# EAGLE board atx-psu-breakout_v1.3 (EAGLE 5.07)
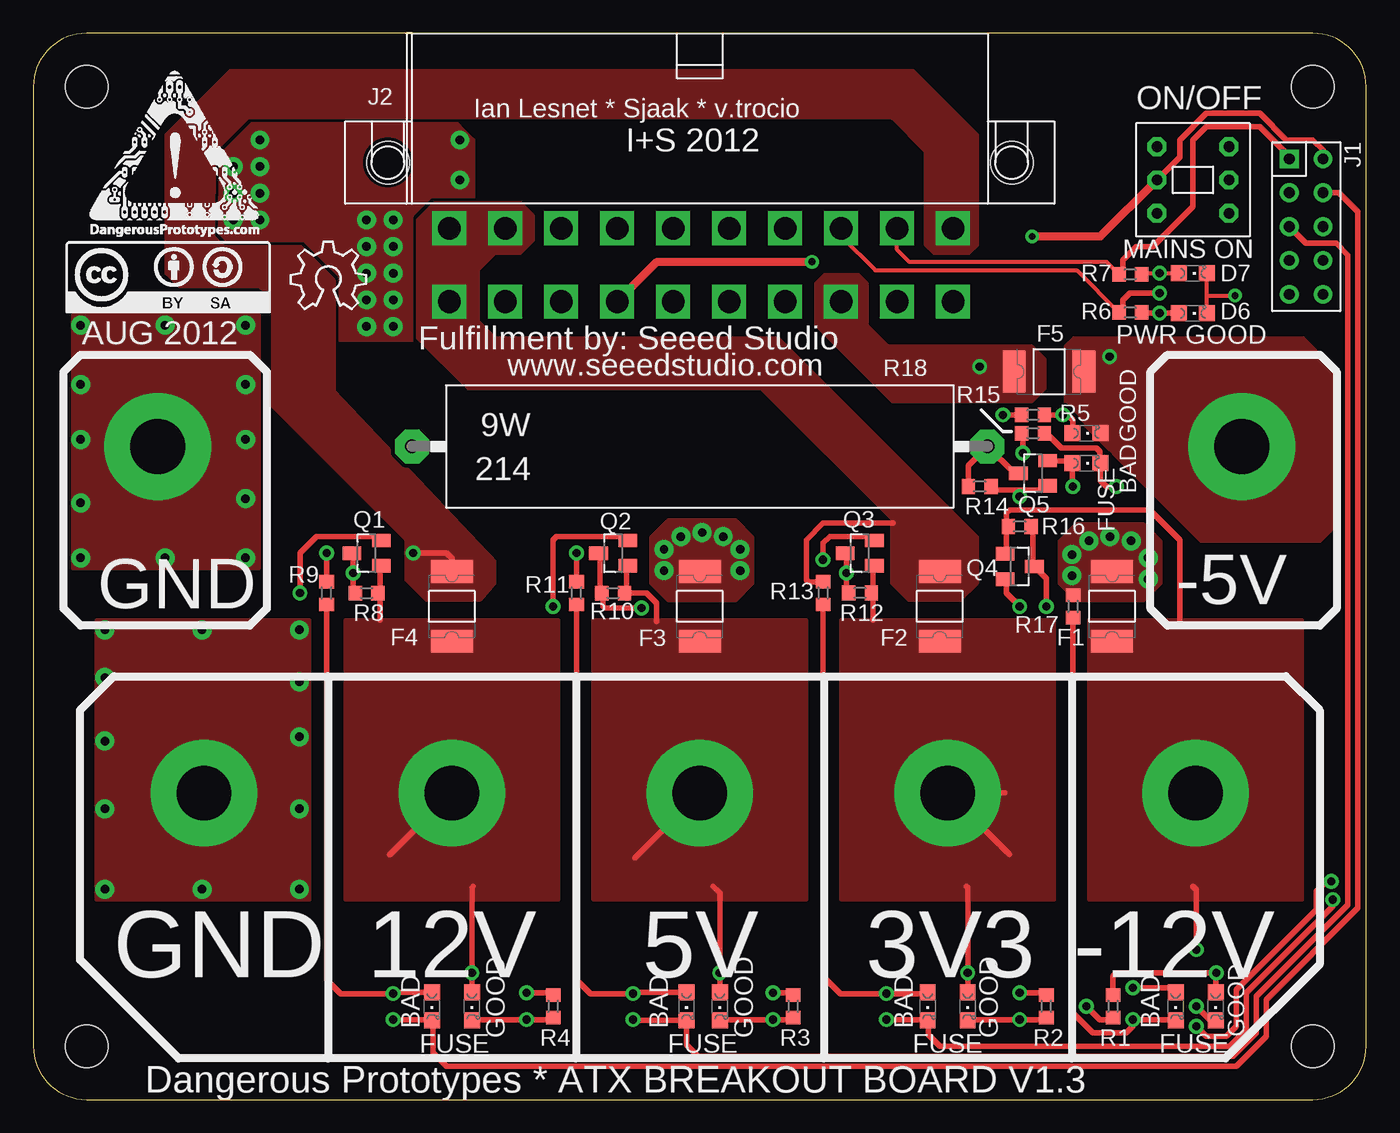
[diagram p0: board, top side]
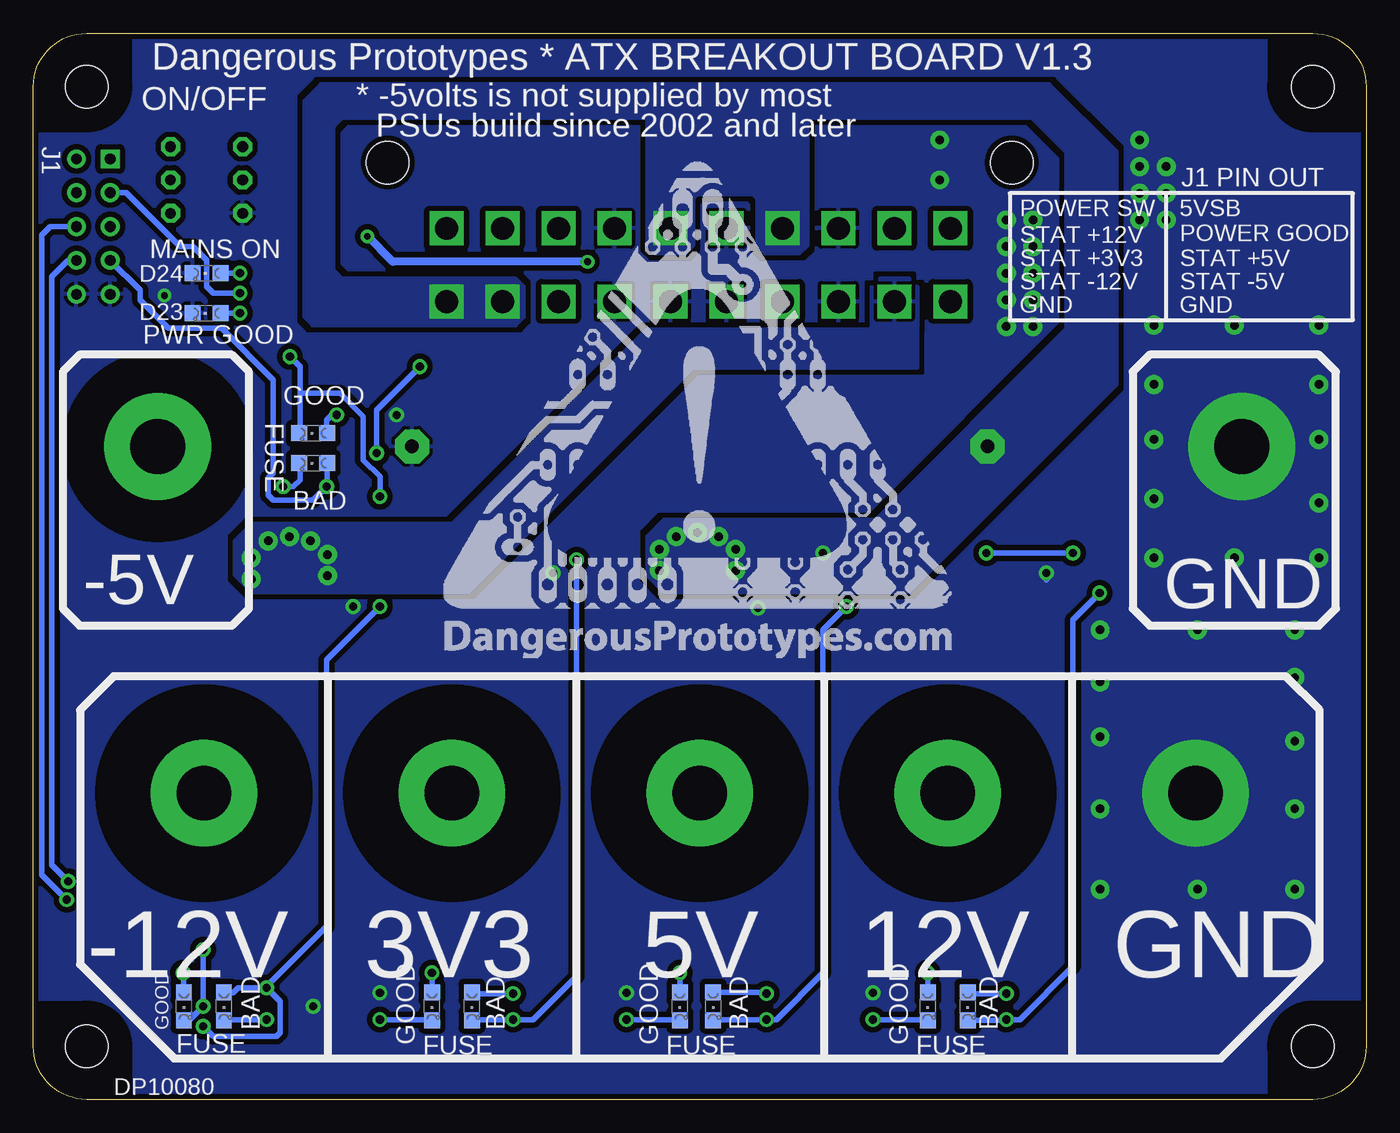
[diagram p1: board, bottom side, seen from below]

Size 100 x 80 mm. Coordinates in mm from the lower left corner, seen from the top.
Copper layers (1*16): Top 0.035mm / dielectric 1.5mm / Bottom 0.035mm
Design rules "SparkFun": minimum track width 8mil, minimum drill 20mil, track to track 8mil, track to pad 8mil, pad to pad 8mil, via to via 8mil, smd to smd 8mil, copper to edge 10mil, drill to drill 8mil, minimum pad ring 12mil, minimum via ring 10mil, stop-mask expansion 4mil, vias tented up to drill 25mil, thermal gap 10mil
tKeepout: area 79.7,15.5 to 94.7,30.5; area 61.1,15.5 to 76.1,30.5; area 61.1,15.5 to 76.1,30.5; area 23.9,15.5 to 38.9,30.5; area 42.5,15.5 to 57.5,30.5; area 83.2,41.5 to 98.2,56.5; area 1.8,41.5 to 16.8,56.5; area 4.9,15.5 to 19.9,30.5
bRestrict: area 25.4,17 to 37.4,29; area 44,17 to 56,29; area 62.6,17 to 74.6,29; area 81.2,17 to 93.2,29; area 85.2,43.5 to 96.2,54.5

## Footprints (pad centres in the part's own frame; a part is rotated, then mirrored left to right if it is on the bottom)
LED-805 = smd 1.2 x 1.2: A 0,-1.05; C 0,1.05
1812L_PTC = smd 1.7 x 3.15: 1 -2.62,0; 2 2.62,0
M2X5 = drill 0.8 square: 1 -5.08,-1.27 | drill 0.8 round: 2 -5.08,1.27; 3 -2.54,-1.27; 4 -2.54,1.27; 5 0,-1.27; 6 0,1.27; 7 2.54,-1.27; 8 2.54,1.27; 9 5.08,-1.27; 10 5.08,1.27
CON_ATX_PWR_90DEG = drill 1.7 square: 1 18.8,4.93; 2 14.6,4.93; 3 10.4,4.93; 4 6.2,4.93; 5 2,4.93; 6 -2.2,4.93; 7 -6.4,4.93; 8 -10.6,4.93; 9 -14.8,4.93; 10 -19,4.93; 11 18.8,10.43; 12 14.6,10.43; 13 10.4,10.43; 14 6.2,10.43; 15 2,10.43; 16 -2.2,10.43; 17 -6.4,10.43; 18 -10.6,10.43; 19 -14.8,10.43; 20 -19,10.43 | hole 3.2: 23.4,0; -23.4,0
SW_PUSH_BUTTON_MINI = drill 0.8 octagon: 1 2.5,2.7; 2 0,2.7; 3 -2.5,2.7; 4 2.5,-2.7; 5 0,-2.7; 6 -2.5,-2.7
PCB8X10 = hole 3.2: 4,4; 96,4; 96,76; 4,76
SOT-23 = smd 1 x 1.4: 1 -0.95,-1.1; 2 0.95,-1.1; 3 0,1.1
R603 = smd 1 x 1.1: 1 -0.85,0; 2 0.85,0
KH214-8 = drill 1.016 pad 2.54 octagon: 1 -21.59,0; 2 21.59,0
PAD_ROUND_4.1MM = drill 4.1 pad 8 round: P 0,0

## Placement (x,y rotation side)
D1  [LED-805]  88.7,7 180 top
D2  [LED-805]  70.1,7 180 top
D3  [LED-805]  51.5,7 180 top
D4  [LED-805]  32.9,7 180 top
D5  [LED-805]  79,49.99 270 top
D6  [LED-805]  87,59 270 top
D7  [LED-805]  87,62 270 top
D8  [LED-805]  29.9,7 180 top
D9  [LED-805]  49,7 180 top
D10  [LED-805]  67.1,7 180 top
D11  [LED-805]  79,47.75 270 top
D12  [LED-805]  85.7,7 180 top
D13  [LED-805]  88.7,7 180 bottom
D14  [LED-805]  85.7,7 180 bottom
D15  [LED-805]  79,50 90 bottom
D16  [LED-805]  79,47.75 90 bottom
D17  [LED-805]  70.1,7 180 bottom
D18  [LED-805]  67.1,7 180 bottom
D19  [LED-805]  51.5,7 180 bottom
D20  [LED-805]  49,7 180 bottom
D21  [LED-805]  32.9,7 180 bottom
D22  [LED-805]  29.9,7 180 bottom
D23  [LED-805]  87,59 90 bottom
D24  [LED-805]  87,62 90 bottom
F1  2A  [1812L_PTC]  80.93,37 270 top
F2  2A  [1812L_PTC]  68,37 270 top
F3  2A  [1812L_PTC]  50,37 270 top
F4  2A  [1812L_PTC]  31.4,37 270 top
F5  2A  [1812L_PTC]  76.2,54.61 0 top
J1  CON_HEADER_2X05-PTH  [M2X5]  95.5,65.5 270 top
J2  CON_ATX_PWR-90DEG  [CON_ATX_PWR_90DEG]  50,70.3 180 top
ON/OFF  SW_PUSH_DPDT  [SW_PUSH_BUTTON_MINI]  87,69 90 top
PCB2  PCB_DP_RECTANGLE-8X10  [PCB8X10]  0,0 0 top
Q1  [SOT-23]  25,41 90 top
Q2  [SOT-23]  43.5,41 90 top
Q3  [SOT-23]  62,41 90 top
Q4  [SOT-23]  74,40 270 top
Q5  [SOT-23]  75,47 90 top
R1  10K  [R603]  81,7 270 top
R2  1.2K  [R603]  76,7 270 top
R3  3.3K  [R603]  57,7 270 top
R4  10K  [R603]  39,7 270 top
R5  3.3K  [R603]  75,51.38 180 top
R6  3.3K  [R603]  82.3,59.05 180 top
R7  3.3K  [R603]  82.3,61.91 180 top
R8  10K  [R603]  25,38 0 top
R9  10K  [R603]  22,38 270 top
R10  10K  [R603]  43.5,38 0 top
R11  3.3K  [R603]  40.75,38 270 top
R12  10K  [R603]  62.03,38.01 0 top
R13  1.2K  [R603]  59.25,38 270 top
R14  10K  [R603]  71,46 180 top
R15  3.3K  [R603]  75,50 180 top
R16  10K  [R603]  74,43 0 top
R17  10K  [R603]  78,37 90 top
R18  10R 9W  [KH214-8]  50,49 180 top
T1  PAD_TERMINAL-4.1MMROUND  [PAD_ROUND_4.1MM]  31.4,23 180 top
T2  PAD_TERMINAL-4.1MMROUND  [PAD_ROUND_4.1MM]  50,23 180 top
T3  PAD_TERMINAL-4.1MMROUND  [PAD_ROUND_4.1MM]  68.6,23 180 top
T4  PAD_TERMINAL-4.1MMROUND  [PAD_ROUND_4.1MM]  90.67,49 180 top
T5  PAD_TERMINAL-4.1MMROUND  [PAD_ROUND_4.1MM]  87.2,23 180 top
T6  PAD_TERMINAL-4.1MMROUND  [PAD_ROUND_4.1MM]  9.34,49 180 top
T7  PAD_TERMINAL-4.1MMROUND  [PAD_ROUND_4.1MM]  12.8,23 180 top
U$1  DINA4_L  [DP_LOGO@1]  1.91,-7.62 0 top  (outside the outline)
U$2  [DP_LOGO_ART_0.5X0.5]  4.25,64.77 0 top
U$3  [CC-BY-SA]  2.46,59.03 0 top
U$4  [OSHW_8X200_NOTEXT]  19.29,59.3 0 top
U$6  LOGO_DP1.5X1.5  [DP_LOGO_ART_1.5X1.5]  69.22,33.16 0 bottom

## Library data of the parts
D1-D24 F1-F5 J1 J2 ON/OFF PCB2 Q1-Q5 R1-R17 T1-T7 U$2 U$3 U$6 = dp_devices
R18 = resistor-power
U$1 = dp_devices; FF1: fulfillment by; FF2: Seeed Studio; FF3: www.seeedstudio.com; LICENSE: CC-BY-SA; PROJECT: ATX BREAKOUT BOARD V1.3; URL1: http://; URL2: DangerousPrototypes.com
U$4 = ohw-logo

## Nets
3V3OUT: D2.A D17.A F2.2 Q3.1 R12.2 T3.P
5VOUT: D3.A D19.A F3.2 Q2.1 R10.2 T2.P
5VSB: J1.1 J2.9 R7.2
12VOUT: D4.A D21.A F4.2 Q1.1 R8.2 T1.P
+3V3: F2.1 J2.1 J2.2 J2.11 R13.1
+5V: F3.1 J2.4 J2.6 J2.19 J2.20 R11.1 R18.2
+12V: F4.1 J2.10 R9.1
-5V: F5.1 J2.18 R15.2
-5VOUT: D5.C D15.C F5.2 Q5.1 R14.1 T4.P
-12V: F1.1 J2.12 R17.2
-12VOUT: D1.C D13.C F1.2 Q4.1 R16.1 T5.P
GND: D6.C D7.C D23.C D24.C J1.9 J1.10 J2.3 J2.5 J2.7 J2.13 J2.15 J2.16 J2.17 ON/OFF.3 Q1.3 Q2.3 Q3.3 Q4.3 Q5.3 R1.2 R2.1 R3.1 R4.1 R5.2 R8.1 R10.1 R12.1 R14.2 R16.2 R18.1 T6.P T7.P
N$2: D6.A D23.A R6.1
N$3: D7.A D24.A R7.1
N$4: D4.C D21.C R4.2
N$5: D8.A D22.A R9.2
N$6: D9.A D20.A R11.2
N$8: D10.A D18.A R13.2
N$10: D11.C D16.C R15.1
N$11: D3.C D19.C R3.2
N$13: D2.C D17.C R2.2
N$16: D12.C D14.C R17.1
N$18: D1.A D13.A R1.1
N$20: D5.A D15.A R5.1
PG: J1.3 J2.8 R6.2
PWR_ON: J1.2 J2.14 ON/OFF.2
STAT_+3V3: D10.C D18.C J1.6 Q3.2
STAT_+5V: D9.C D20.C J1.5 Q2.2
STAT_+12V: D8.C D22.C J1.4 Q1.2
STAT_-5V: D11.A D16.A J1.7 Q5.2
STAT_-12V: D12.A D14.A J1.8 Q4.2

## Tracks (layer width: path | path; a pad name or v marks a point on that pad's centre or on a via)
3V3OUT  (via drill 0.61)
  Top 0.406: 72.89,23 T3.P 73.22,18.38 | D17.A v70.1,9.5 70.1,15.9 70,16 | Q3.1 63.05,40.05 63,40 63,38.13 | R12.2 63,38.13 | 63,38.13 63,36
  Bottom 0.406: 70.1,8.1 D17.A v70.1,9.5
  pour Top (no thermals): 76.6,15 60.6,15 60.6,36 76.6,36
5VOUT  (via drill 0.61)
  Top 0.406: 45.15,18.15 T2.P | D19.A v51.5,9.5 51.5,15.5 51,16 | R10.2 44.5,38 | 44.5,38 44.5,39.95 Q2.1 | 44.5,38 46,38 46.75,37.25 46.75,35.88
  Bottom 0.406: D19.A v51.5,9.5
  pour Top (no thermals): 58,36 58,15 42,15 42,36
5VSB
  Top 0.305: J2.9 64.8,63.77 65.71,62.85 80.51,62.85 R7.2
  Top 0.406: J1.1 94.23,70.77 92,73 88,73 87,72 87,67 84,64 82.75,64 81.75,63 81.75,62.21 R7.2
12VOUT  (via drill 0.61)
  Top 0.406: 26.74,18.34 T1.P | D21.A v32.9,9.5 32.9,15.9 33,16 | R8.2 26,38 | 26,38 26,39.95 Q1.1 | 26,38 26,36
  Bottom 0.406: D21.A v32.9,9.5
  pour Top (no thermals): 39.4,36 39.4,15 23.4,15 23.4,36
+3V3
  Top 0.406: R13.1 58.15,38.85 58,39 58,42 59.25,43.25 64.5,43.25
  pour Top (isolate 0.305, no thermals): 69.52,37.47 65.71,37.47 64.44,38.73 64.44,43.56 54.75,53.25 54.72,53.34 52.07,53.34 32.69,53.33 28.88,57.14 28.88,66.03 30.15,67.3 36.5,67.3 37.45,66.35 37.45,64.44 36.5,63.49 34.59,63.49 33.33,62.22 33.33,58.41 34.59,57.14 54.61,57.15 55.88,57.15 70,43 70.79,42.21 70.79,38.73
+5V  (via drill 0.61, 0.64 pad 1.42)
  Top 0.406: R11.1 v40.75,41
  other vias: 48.59,42.23 51.76,42.23 50.17,42.55 53.03,41.27 47.32,41.27 53.03,39.69 47.32,39.69
  pour Bottom (isolate 0.305, no thermals): 53.97,39.36 52.7,38.09 34.29,38.1 18.72,53.67 18.72,71.11 23.8,76.19 78.41,76.19 79.68,74.92 79.68,58.73 79.05,58.09 63.8,58.09 63.17,58.73 63.17,60.95 63.8,61.59 76.82,61.59 77.46,62.22 77.46,73.02 76.82,73.65 53.96,73.65 53.96,64.12 53.33,63.49 51.1,63.49 50.47,64.12 50.47,67.62 50.15,67.94 46.02,67.94 45.71,67.62 45.71,64.12 45.07,63.49 42.53,63.49 41.9,64.12 41.9,73.65 25.07,73.65 22.53,71.11 22.53,57.8 36.83,43.5 52.72,43.5 53.97,42.22
  pour Top (no thermals): 52.7,37.45 47.62,37.45 46.35,38.73 46.35,42.22 47.62,43.49 52.7,43.49 53.97,42.22 53.97,38.73
+12V  (via drill 0.61)
  Top 0.406: R9.1 v22,41 | F4.1 31.4,40.6 31,41 v28.5,41
  Bottom 0.406: v22,41 v28.5,41
  pour Top (isolate 0.305, no thermals): 70.16,63.49 67.61,63.49 66.98,64.12 66.98,71.11 64.44,73.65 16.07,73.65 13.53,71.11 13.5,64.75 14.25,64 20,64 22.53,61.47 22.53,53.17 34,41 34.37,40.63 34.58,40.38 34.58,38.73 33.5,37.5 29.5,37.5 28,39 28,42 17.99,52.01 17.99,60.01 17,61 11,61 10,62 9.99,72.38 14.8,77.19 65.98,77.19 70.79,72.38 70.79,64.12
-5V  (via drill 0.61)
  Top 0.406: R15.2 74.25,50 v74.25,48.5
  Bottom 0.406: v74.25,48.5 74.25,51.75 v71,55
  pour Top (no thermals): 75.88,55.56 75.88,53.34 74.93,52.39 64.45,52.39 58.73,58.12 58.73,61.27 59.36,61.9 61.9,61.9 62.53,61.27 62.53,58.12 64.14,56.52 74.93,56.52
-5VOUT  (via drill 0.61)
  Top 0.406: Q5.1 76.1,46.02 76.12,46 | R14.1 71.85,45.9 72,45.75 74,45.75 | 74,45.75 75.8,45.75 | 75.8,45.75 Q5.1 | Q5.1 76.1,45.85 76,45.75 75.8,45.75 | 74,45.75 v74,45.25
  Bottom 0.406: v74,45.25 74,46.75 75.25,48 75.25,51.25 77,53 80,53 | D15.C 80,50 80,53 | 80,53 80,55 v80.75,55.75
  pour Top (isolate 0.305, no thermals): 78.11,57.15 95.25,57.15 97.79,54.61 97.79,43.18 96.52,41.91 87.63,41.91 77.47,52.07 77.47,56.52
-12V  (via drill 0.64 pad 1.42)
  other vias: 79.2,41.91 80.78,42.23 82.37,41.91 77.93,40.89 83.64,40.64 77.93,39.3 83.64,39.05
  pour Bottom (isolate 0.305): 84.9,39.36 83.63,38.09 67.31,38.1 50.48,54.93 33.66,54.93 33.64,60.95 34.28,61.59 36.5,61.59 37.13,60.95 37.13,57.77 53.98,57.77 68.58,43.18 83.63,43.17 84.9,41.9
  pour Top (no thermals): 84.58,38.73 83.31,37.45 78.23,37.45 76.96,38.73 76.96,41.9 78.23,43.17 83.31,43.17 84.58,41.9
-12VOUT  (via drill 0.61)
  Top 0.406: T5.P 88.53,23 | 86.15,21.95 T5.P | T5.P 88.25,21.95 | 87,16 87.25,15.75 v87.25,11.25 | 86,36 86,42 83.75,44.25 73.25,44.25 73,44 73,43.15 R16.1 73,42.85 73,41 72.95,40.95 Q4.1 | 87.5,6.75 v87.25,7 88.3,5.95 D13.C
  Bottom 0.406: v87.25,11.25 v87.25,7 88.3,5.95 D13.C
  pour Top (no thermals): 95.2,15 79.2,15 79.2,36 95.2,36
GND  (via drill 0.51, 0.6, 0.61, 0.64 pad 1.42)
  Top 0.305: D23.C 88.05,60.33 | 88.05,60.33 D24.C | 88.05,60.33 v90.17,60.33
  Top 0.406: v72.75,51.38 R5.2 | R4.1 39,8 v37,8 | R16.2 75,42.85 75,40 Q4.3 76,39.1 v76,37 | R12.1 61.01,38.01 61,38 v61,39.5 61,40.9 Q3.3 | Q2.3 42.5,40.9 42.5,38 R10.1 42.75,38 42.75,37 42.88,36.88 v45.62,36.88 | R8.1 24,38 v24,39.5 24,40.9 Q1.3 | R14.2 70.15,47.56 R18.1 73.59,47 Q5.3 | R1.2 81,6 80,6 v79,7 | v55.5,8 57,8 R3.1 | v74,8 76,8 R2.1
  Bottom 0.406: v24,39.5 24,39
  other vias: 5.36,35.24 12.66,35.24 19.96,35.24 19.96,31.34 19.96,27.21 19.96,21.81 19.96,15.78 12.66,15.78 5.36,15.78 5.36,21.81 5.36,26.89 5.36,31.66 3.54,58.1 9.89,58.1 15.92,58.1 15.92,53.66 15.92,49.53 15.92,45.09 15.92,40.64 9.89,40.64 3.54,40.64 3.54,44.77 3.54,49.53 3.54,53.66 15,66 15,70 17,70 15,68 27,58 25,58 25,60 27,60 25,62 32,69 32,72 27,62 27,64 27,66 25,64 25,66 17,66 17,72 17,68
  pour Bottom (isolate 0.406, rank 6): 0,80 0,0 100,0 100,80
  pour Top: 20.72,36 20.72,15 4.72,15 4.72,36
  pour Top: 16.95,58.86 16.95,39.86 2.95,39.86 2.95,58.86
  pour Top (rank 6): 17,74 31,74 33,72 33,57 22,57 22,62 20,64 13,64 13,71
N$2  (via drill 0.61)
  Top 0.305: R6.1 83.2,59
  Top 0.406: 83.2,59 v84.5,59 D23.A
  Bottom 0.406: v84.5,59 D23.A
N$3  (via drill 0.61)
  Top 0.305: D24.A v84.5,62 83.24,62 R7.1
  Bottom 0.406: v84.5,62 D24.A
N$4  (via drill 0.61)
  Top 0.406: D21.C 32.95,6 v37,6 | v37,6 35.15,6 | R4.2 39,6 v37,6
  Bottom 0.406: v37,6 32.95,6 D21.C
N$5  (via drill 0.61)
  Top 0.406: R9.2 22,9 23.05,7.95 v27,7.95 27.1,8.05 D22.A
  Bottom 0.406: D22.A 29.8,7.95 v27,7.95
N$6  (via drill 0.61)
  Top 0.406: R11.2 40.75,9 41.8,7.95 v45,7.95 45.1,8.05 D9.A
  Bottom 0.406: D9.A 45.1,8.05 v45,7.95
N$8  (via drill 0.61)
  Top 0.406: R13.2 59.25,9.25 60.55,7.95 v64,7.95 67,7.95 D10.A
  Bottom 0.406: v64,7.95 67,7.95 D10.A
N$10  (via drill 0.61)
  Top 0.406: R15.1 76,50 77.12,48.88 79.75,48.88 80,48.62 80,47.8 D11.C 80.05,46.45 80.5,46 v81.25,46
  Bottom 0.406: 80.12,47.75 D11.C 80,47.7 80,46.5 80.5,46 v81.25,46
N$11  (via drill 0.61)
  Top 0.406: D19.C 51.55,6 v55.5,6 57,6 R3.2
  Bottom 0.406: v55.5,6 51.55,6 D19.C
N$13  (via drill 0.61)
  Top 0.406: D17.C 70.15,6 v74,6 76,6 R2.2
  Bottom 0.406: v74,6 70.15,6 D17.C
N$16  (via drill 0.61)
  Top 0.406: R17.1 78,6.5 79.5,5 82,5 82.5,5.5 v82.5,6 85.65,6 D12.C
  Bottom 0.406: 86,6 85.95,5.95 D12.C 85.65,6 v82.5,6
N$18  (via drill 0.61)
  Top 0.406: 88.75,8 D13.A 88.7,9.45 v88.75,9.5 81.25,9.5 81,9.25 R1.1
  Bottom 0.406: D13.A 88.7,9.45 v88.75,9.5
N$20  (via drill 0.61)
  Top 0.406: R5.1 v77.25,51.38 77.62,51.38 78,51 78,50.04 D5.A 77.75,50.19
  Bottom 0.406: v77.25,51.38 77.62,51.38 78,51 78,50.05 D15.A D5.A
PG  (via drill 0.61)
  Top 0.305: J2.8 60.6,64.79 63.17,62.22 78.28,62.22 R6.2
  Top 0.406: v84.5,60.5 82.25,60.5 81.75,60 81.75,59.35 R6.2
  Bottom 0.406: J1.3 93.04,68.04 89,64 88,64 87,63 87,61 86.5,60.5 v84.5,60.5
PWR_ON  (via drill 0.51)
  Top 0.406: J1.2 96.77,71.23 96,72 94,72 92,74 88,74 86,72 86,70.7 ON/OFF.2
  Top 0.61: v74.93,64.77 80.07,64.77 ON/OFF.2 | v58.42,62.87 46.8,62.87 J2.14
  Bottom 0.61: v58.42,62.87 73.03,62.87 v74.93,64.77
STAT_+3V3  (via drill 0.61)
  Top 0.406: Q3.2 62.8,41.95 62.5,42.25 59.75,42.25 59.25,41.75 v59.25,40.5 | v97.5,15 97.5,14.5 91,8 91,5.25 89.75,4 68,4 67.15,4.85 67.15,6 D10.C 67.05,6 v64,6
  Bottom 0.406: v59.25,40.5 59.25,9.25 62.5,6 v64,6 67.05,6 D10.C | v97.5,15 99.38,16.88 99.38,64.88 98.75,65.5 J1.6
STAT_+5V  (via drill 0.61)
  Top 0.406: Q2.2 44.3,41.95 44,42.25 39.25,42.25 39,42 v39,37 | J1.5 95.48,64.25 97.75,64.25 98.62,63.38 98.62,14.62 91.75,7.75 91.75,5 90,3.25 49.88,3.25 49,4.12 D9.C 45.05,5.95 v45,6
  Bottom 0.406: v39,37 40.75,35.25 40.75,9.5 44.25,6 v45,6 48.95,6 D9.C
STAT_+12V  (via drill 0.61)
  Top 0.406: Q1.2 25.8,41.95 25.5,42.25 21.25,42.25 20,41 v20,38 | J1.4 97.96,68.04 99.38,66.62 99.38,14.38 92.5,7.5 92.5,4.75 90.25,2.5 31,2.5 30,3.5 30,5.85 D22.C 29.85,6 v27,6
  Bottom 0.406: v20,38 22,36 22,10 26,6 v27,6 27.05,5.95 D22.C
STAT_-5V  (via drill 0.61)
  Top 0.406: Q5.2 76.1,47.9 77.85,47.9 D11.A 77.95,46.05 v78,46
  Bottom 0.406: J1.7 92,60.73 92,60 89.88,57.88 85.88,57.88 82,54 82,47 82.38,46.62 82.38,45.38 82,45 79,45 v78,46 77.95,46.05 D11.A
STAT_-12V  (via drill 0.61)
  Top 0.406: v74,37 73,38 73,38.95 Q4.2 | v97.38,16.38 97,16.38 96.25,15.62 96.25,14.25 90.25,8.25 90.25,5.5 89.5,4.75 88,4.75 v87.25,5.5 | 85.65,8 D12.A 85.38,8.38 v82.5,8.38
  Bottom 0.406: v74,37 78,33 78,13 82.5,8.5 v82.5,8.38 | v97.38,16.38 98.62,17.62 98.62,61.75 97.42,62.96 J1.8 | v82.5,8.38 84.62,8.38 85,8 85.05,8.05 D12.A | v87.25,5.5 86.5,4.75 81.75,4.75 81.5,5 81.5,7.38 v82.5,8.38

## Text on the board
tPlace: GND | -5V | GND | 12V | 5V | 3V3 | -12V
bPlace: GND | -5V | GND | 12V | 5V | 3V3 | -12V
tNames: Ian Lesnet * Sjaak * v.trocio | I+S 2012 | MAINS ON | AUG 2012 | PWR GOOD | Fulfillment by: Seeed Studio | www.seeedstudio.com | GOOD | BAD | FUSE | BAD | GOOD | BAD | GOOD | BAD | GOOD | BAD | GOOD | FUSE | FUSE | FUSE | FUSE | Dangerous Prototypes * ATX BREAKOUT BOARD V1.3
bNames: Dangerous Prototypes * ATX BREAKOUT BOARD V1.3 | * -5volts is not supplied by most | ON/OFF | PSUs build since 2002 and later | J1 | J1 PIN OUT | 5VSB | POWER SW | POWER GOOD | STAT +12V | MAINS ON | STAT +5V | STAT +3V3 | STAT -5V | STAT -12V | GND | GND | PWR GOOD | GOOD | FUSE | BAD | BAD | BAD | BAD | BAD | GOOD | GOOD | GOOD | GOOD | FUSE | FUSE | FUSE | FUSE